# Altium PCB pwm-tl494.PcbDoc
Units mm, origin at the board's own origin, x right, y up, seen from the top; angles counter-clockwise.
Board outline 35 x 26 mm, 2 copper layers (Top Layer, Bottom Layer), stack 1.671 mm thick; 14 components, 13 nets, 50 pads, 0 vias.
Unrouted connection lines stored in the file: 22.
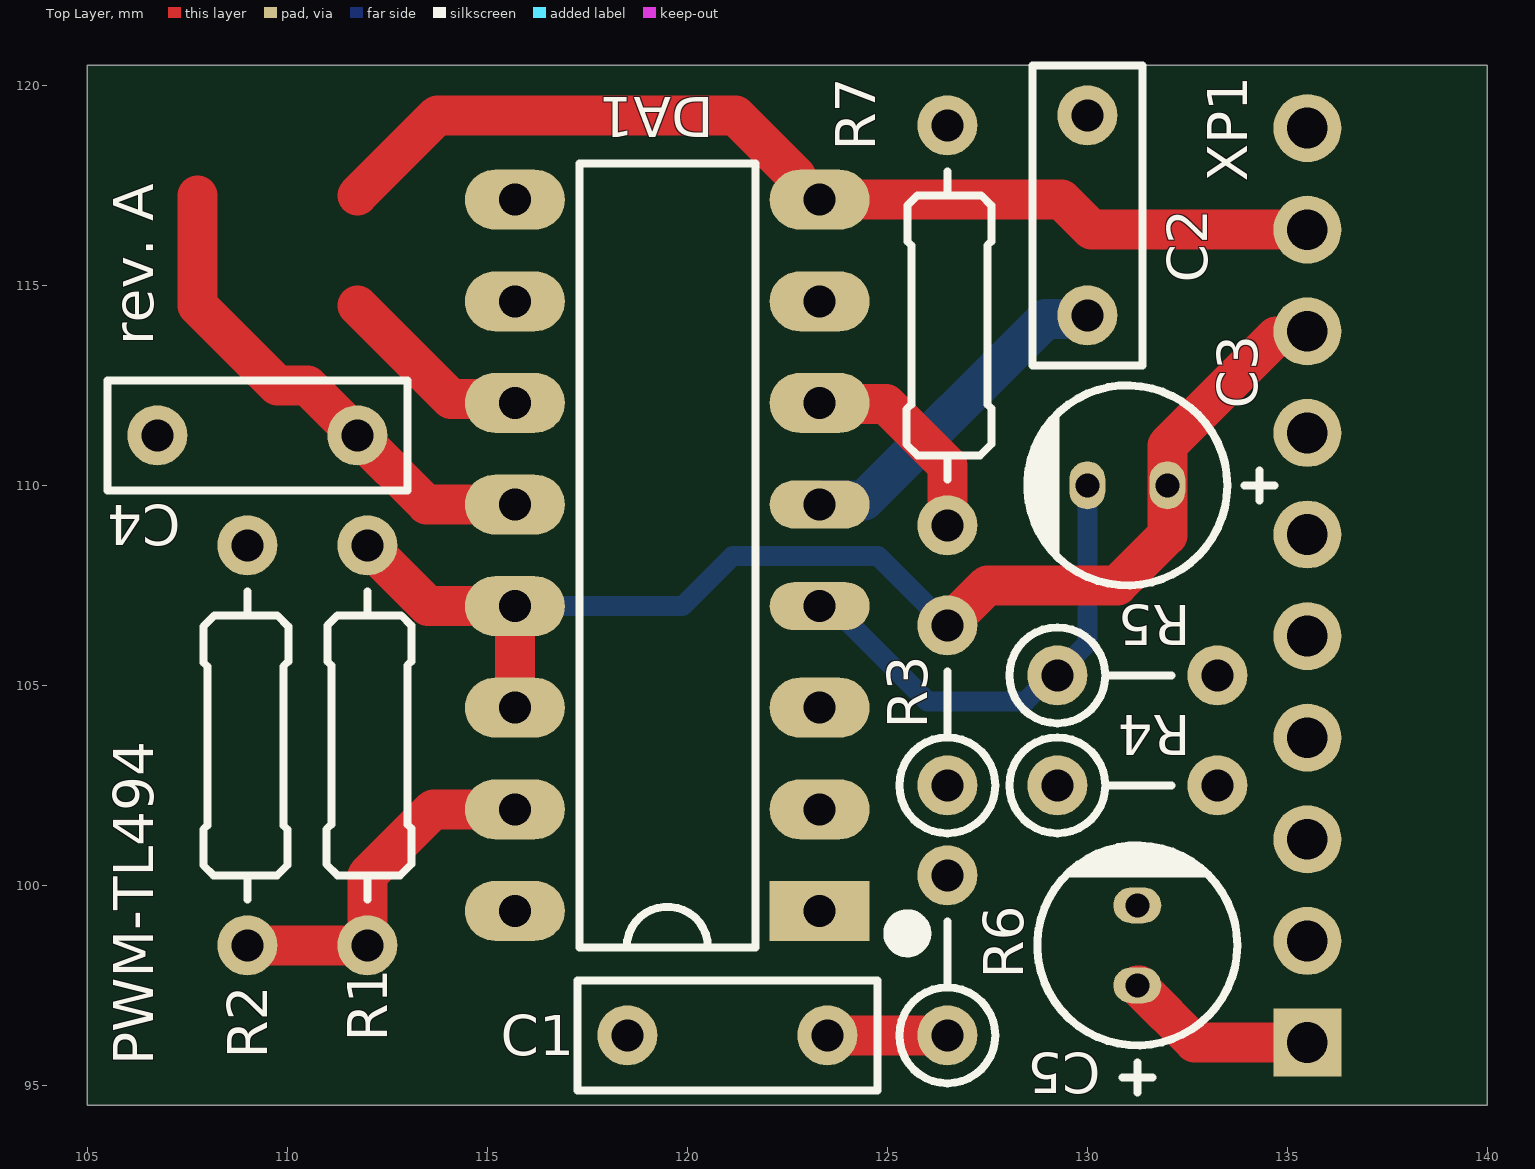
[diagram p0: Top Layer view]
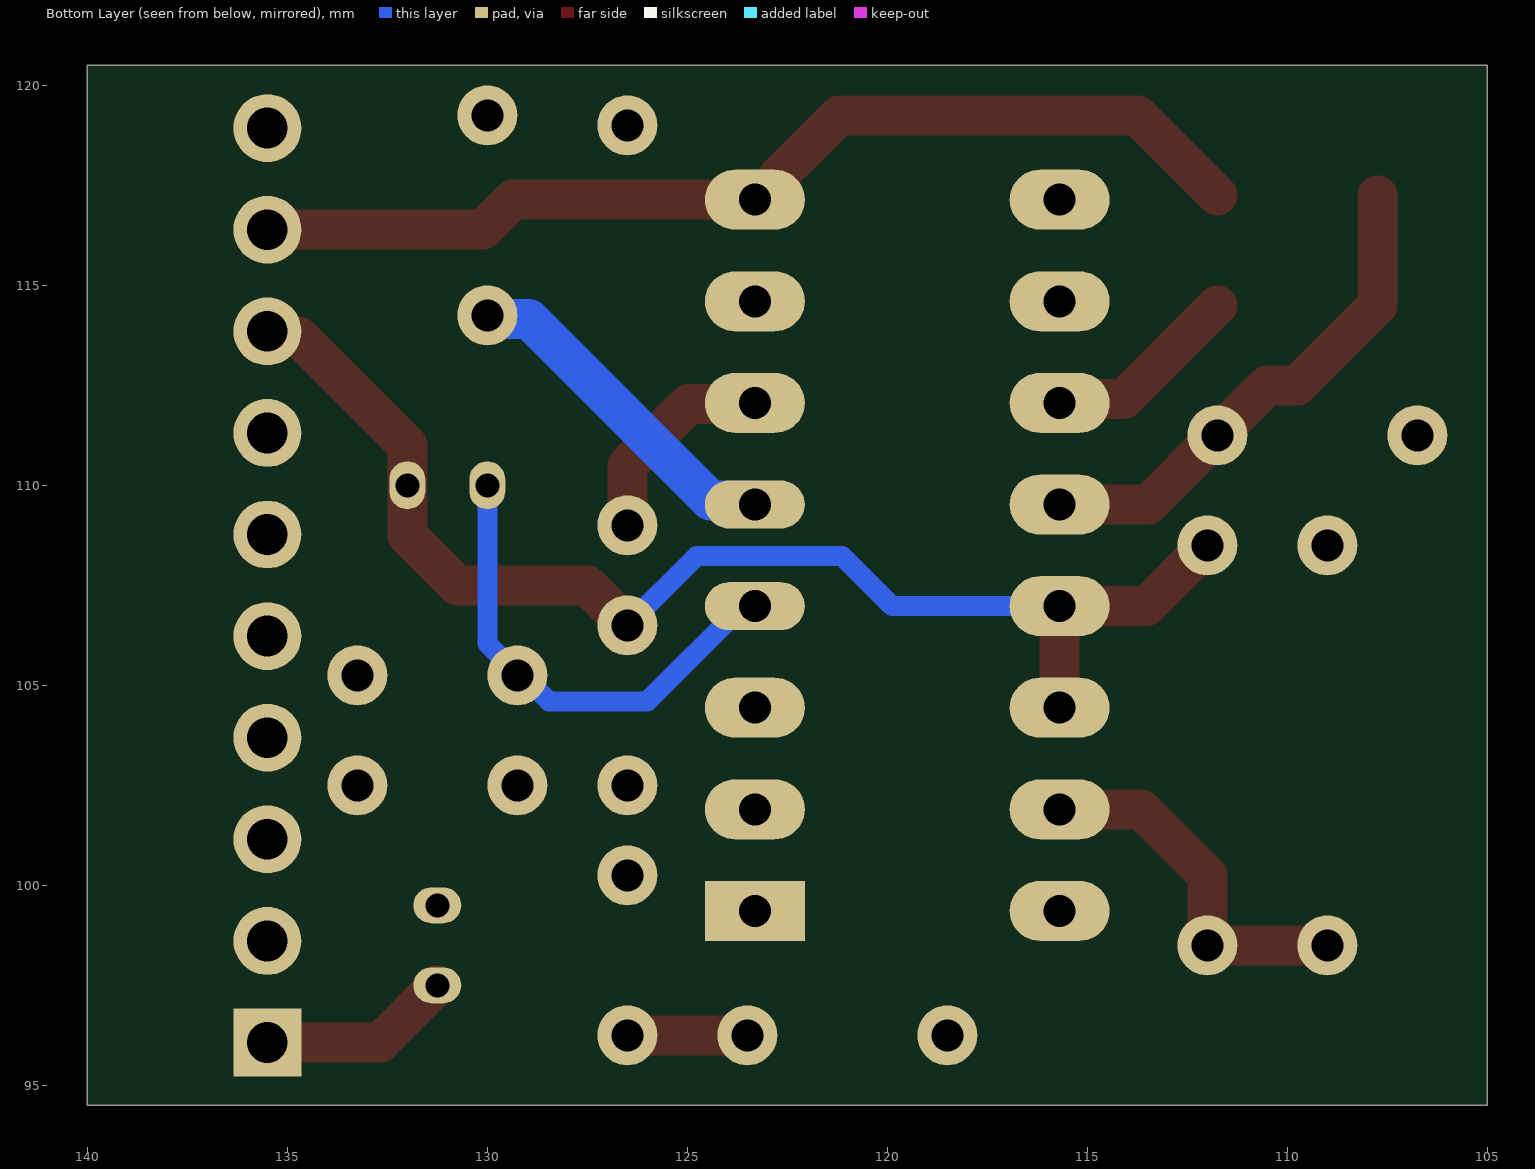
[diagram p1: Bottom Layer view, seen from below]

## Layer stack, top to bottom
Top Solder: solder mask 0.0102, Solder Resist, Dk 3.5
Top Layer: signal copper 0.0356
Dielectric 1: dielectric 1.6, FR-4, Dk 4.8
Bottom Layer: signal copper 0.0356
Bottom Solder: solder mask 0.0102, Solder Resist, Dk 3.5

## Board outline
105,94.5 140,94.5 140,120.5 105,120.5

## Design rules (kind name [scope] priority, off if disabled: settings)
Clearance [All] p1: gap=0.4 ignorepadtopadclearanceinfootprint=FALSE
PolygonConnect [All] p1: connectstyle=Relief reliefconductorwidth=0.254 reliefentries=4 polygonreliefangle="90 Angle" airgapwidth=0.254
RoutingVias [All] p1: holewidth=0.5 width=1 viastyle="Through Hole" minholewidth=0.5 minwidth=1 maxholewidth=2.5 maxwidth=3
SolderMaskExpansion [All] p1: expansion=0.102 istentingtop=FALSE
Width [All] p1: maxlimit=2.5 minlimit=0.3 preferedwidth=0.5 minimp=50.000000 maximp=50.000000 favimp=50.000000
30 further rules are at their usual default settings.

## Components (designator, comment, footprint, x,y, rotation, side; value= is the part's Value field where it differs from the comment)
C1 "0.1u" CL23B_7.2x2.5 121,96.25 r180 top
C2 "0.022u" CL23B_7.2x2.5 130,116.75 r90 top
C3 "22u" ECAP5X11X2.0_BRW 131,110 r270 top
C4 "0.1u" CL23B_7.2x2.5 109.25,111.25 r0 top
C5 "22u" ECAP5X11X2.0_BRW 131.25,98.5 r180 top
DA1 "TL494CN" DIP-16P-M03 119.5,108.25 r180 top
R1 "2k" CFR-25 112,103.5 r270 top
R2 "10k" CFR-25 109,103.5 r90 top
R3 "10k" CFR-25(VERTICAL) 126.5,104.5 r270 top
R4 "10k" CFR-25(VERTICAL) 131.25,102.5 r180 top
R5 "10k" CFR-25(VERTICAL) 131.25,105.25 r180 top
R6 "10k" CFR-25(VERTICAL) 126.5,98.25 r270 top
R7 "47k" CFR-25 126.5,114 r270 top
XP1 "PLS-10R" PLS-10R 135.5,96.07 r90 top

## Footprints (in the part's own frame and the unit in brackets; to place one, negate y for a bottom-side part, rotate by r counter-clockwise, add the part's x,y. Pads: shape width x height; smd on the part's side, far side on the other; paste and mask are expansions set on the pad)
CFR-25 [mm] "Carbon Film Resistors 1/4W"
  round 1.5 hole 0.8 mask+0.075: 1(-5,0) 2(5,0)
  silkscreen extent -3.85,-1.02 3.85,1.1, body extent -5.23,-1.15 5.22,1.25, height 3.7
CFR-25(VERTICAL) [mm] "Carbon Film Resistors 1/4W"
  round 1.5 hole 0.8 mask+0.075: 1(-2,0) 2(2,0)
  silkscreen extent -0.85,-1.2 3.2,1.2, body extent -2.23,-1.2 3.2,1.2, height 9.84
CL23B_7.2x2.5 [mm] "Box-type 7.2x2.5x6.5mm"
  round 1.5 hole 0.8 mask+0.075: 1(-2.5,0) 2(2.5,0)
  silkscreen extent -3.75,-1.38 3.75,1.38, body extent -3.6,-1.25 3.6,1.25, height 6.55
DIP-16P-M03 [mm] "Plastic DIP, 16 pin, lead pitch 2.54mm (0.1\"), row spacing 7.62mm (0.3\")"
  rect 2.5x1.5 hole 0.8 mask+0.075: 1(-3.81,8.89)
  oval 2.5x1.5 hole 0.8 mask+0.075: 2(-3.81,6.35) 3(-3.81,3.81) 6(-3.81,-3.81) 7(-3.81,-6.35) 8(-3.81,-8.89) 9(3.81,-8.89) 10(3.81,-6.35) 11(3.81,-3.81) 12(3.81,-1.27) 13(3.81,1.27) 14(3.81,3.81) 15(3.81,6.35) 16(3.81,8.89)
  oval 2.5x1.2 hole 0.8 mask+0.075: 4(-3.81,1.27) 5(-3.81,-1.27)
  silkscreen extent -6.3,-9.8 2.2,9.8, body extent -3.93,-9.7 3.94,9.7, height 4.66
ECAP5X11X2.0_BRW [mm] "Aluminium Capacitor"
  oval 1.2x0.9 hole 0.6 mask+0.075: 1(0,1) 2(0,-1)
  silkscreen extent -2.5,-2.51 2.5,3.67, body extent -2.5,-2.5 2.5,2.5, height 11.05
PLS-10R [mm]
  rect 1.7x1.7 hole 1.02: 1(0,0)
  round 1.7 hole 1.02: 2(2.54,0) 3(5.08,0) 4(7.62,0) 5(10.16,0) 6(12.7,0) 7(15.24,0) 9(20.32,0) 10(22.86,0)
  round 1.7 hole 1.02 paste+0: 8(17.78,0)
  body extent -1.27,-10.8 24.14,0.32, height 3.09

## Part data
C1 C2 C4: library part CL23B, "Box-type metallized polyester film capacitor", Dielectric=Polyester, Tolerance="± * %", Voltage=63V, Package=CL23B
  C1 C4: Value on schem=0.1u
  C2: Value on schem=0.022u
C3 C5: library part C_ECAP, "Aluminium capacitor", Manufacturer=Nichicon, Package=5x11, Part Number=UVR1J220MDD, Tolerance="± 20 %", Voltage=63V, Value on schem=22u
DA1: "Pulse-Width-Modulation Control Circuits", Manufacturer="Texas Instruments", Package=DIP-16, Part Number=TL494CN
R1: library part CF25, "Resistor 1/4W", Manufacturer=Yageo, Package=1/4, Part Number=MFR-25FTF52-2K, Temperature coefficient="±100 ppm/°C", Tolerance="± 1 %", Voltage=250V, Value on schem=2k
R2 R3 R4 R5 R6: library part CF25, "Resistor 1/4W", Manufacturer=Yageo, Package=1/4, Part Number=MFR-25FTF52-10K, Temperature coefficient="±100 ppm/°C", Tolerance="± 1 %", Voltage=250V, Value on schem=10k
R7: library part CF25, "Resistor 1/4W", Manufacturer=Yageo, Package=1/4, Part Number=MFR-25FTF52-47K, Temperature coefficient="±100 ppm/°C", Tolerance="± 1 %", Voltage=250V, Value on schem=47k

## Nets (pads, with @x,y where several pads share a name; then routed paths per layer and width w, separated by ;. In a path a pad name is that pad's centre, name@x,y a point inside that pad or via, vN(x,y) a via of type N, cw(c..) or ccw(c..) an arc to the next point about the centre after c; other vN are vias at no path point)
FB_CURRENT: DA1.16 XP1.5
FB_VOLTAGE: DA1.1 XP1.6
GND: C2.2 C4.1 C5.2 DA1.7 R2.2 R4.1 R5.1 R7.1 XP1.2 XP1.3
NetC1_1: C1.1 DA1.3 R6.2 | length 3
  Top Layer w1: C1.1 R6.2
NetC1_2: C1.2 DA1.2 R3.2 R4.2 R6.1
NetC2_1: C2.1 DA1.5 | length 8.6
  Bottom Layer w1: DA1.5 123.406,109.616 124.416,109.616 128.954,114.154 129.904,114.154 C2.1
NetC3_2: C3.2 DA1.4 R5.2 | length 12.3
  Bottom Layer w0.5: DA1.4 123.62,106.98 126,104.6 128.457,104.6 129.107,105.25 R5.2 129.25,105.293 130,106.043 C3.2
NetDA1_6: DA1.6 R7.2 | length 5.3
  Top Layer w1: DA1.6 123.336,112.034 124.966,112.034 126.5,110.5 R7.2
NetDA1_15: DA1.15 R1.2 R2.1 | length 9.1
  Top Layer w1: R2.1 R1.2 112,100.25 113.65,101.9 DA1.15
PWM_H: DA1.9 XP1.9
PWM_L: DA1.10 XP1.10 | length 26
  Top Layer w1: 111.75,117.25 113.75,119.25 121.2,119.25 122.714,117.736 122.714,117.371 122.945,117.14 123.31,117.14 129.36,117.14 130.11,116.39 135.5,116.39
REF_5V0: C3.1 DA1.13 DA1.14 R1.1 R3.1 XP1.8 | length 32.3
  Top Layer w1: R1.1 113.52,106.98 DA1.13 DA1.14 ; R3.1 127.5,107.5 130.75,107.5 132,108.75 C3.1 132,111 134.716,113.716 135.366,113.716 XP1.8
  Bottom Layer w0.5: DA1.13 119.88,106.98 121.13,108.23 124.77,108.23 R3.1
VCC_12V: C4.2 C5.1 DA1.8 DA1.11 DA1.12 XP1.1 | length 22.6
  Top Layer w1: 107.75,117.25 107.75,114.5 109.75,112.5 110.5,112.5 C4.2 113.48,109.52 DA1.12 ; 111.75,114.5 114.094,112.156 115.594,112.156 DA1.11 ; C5.1 131.3,97.5 131.35,97.45 131.35,97.4 132.68,96.07 XP1.1
pads on no net: XP1.4 XP1.7

## Silkscreen, mask and mechanical layers (free items; w line width, h text height)
Top Overlay:
  text "rev. A" at 106.65,113.5 h1 r90
  text "PWM-TL494" at 106.65,95.5 h1 r90
Outline:
  the board outline again, w0.2